# Altium PCB smarmcuPcb.PcbDoc
Units mil, origin at the board's own origin, x right, y up, seen from the top; angles counter-clockwise.
Board outline 2370 x 1812 mil, 4 copper layers (Top Layer, GND_layer, 3.3V_layer, Bottom Layer), stack 23.756 mil thick; 88 components, 43 nets, 255 pads, 84 vias.
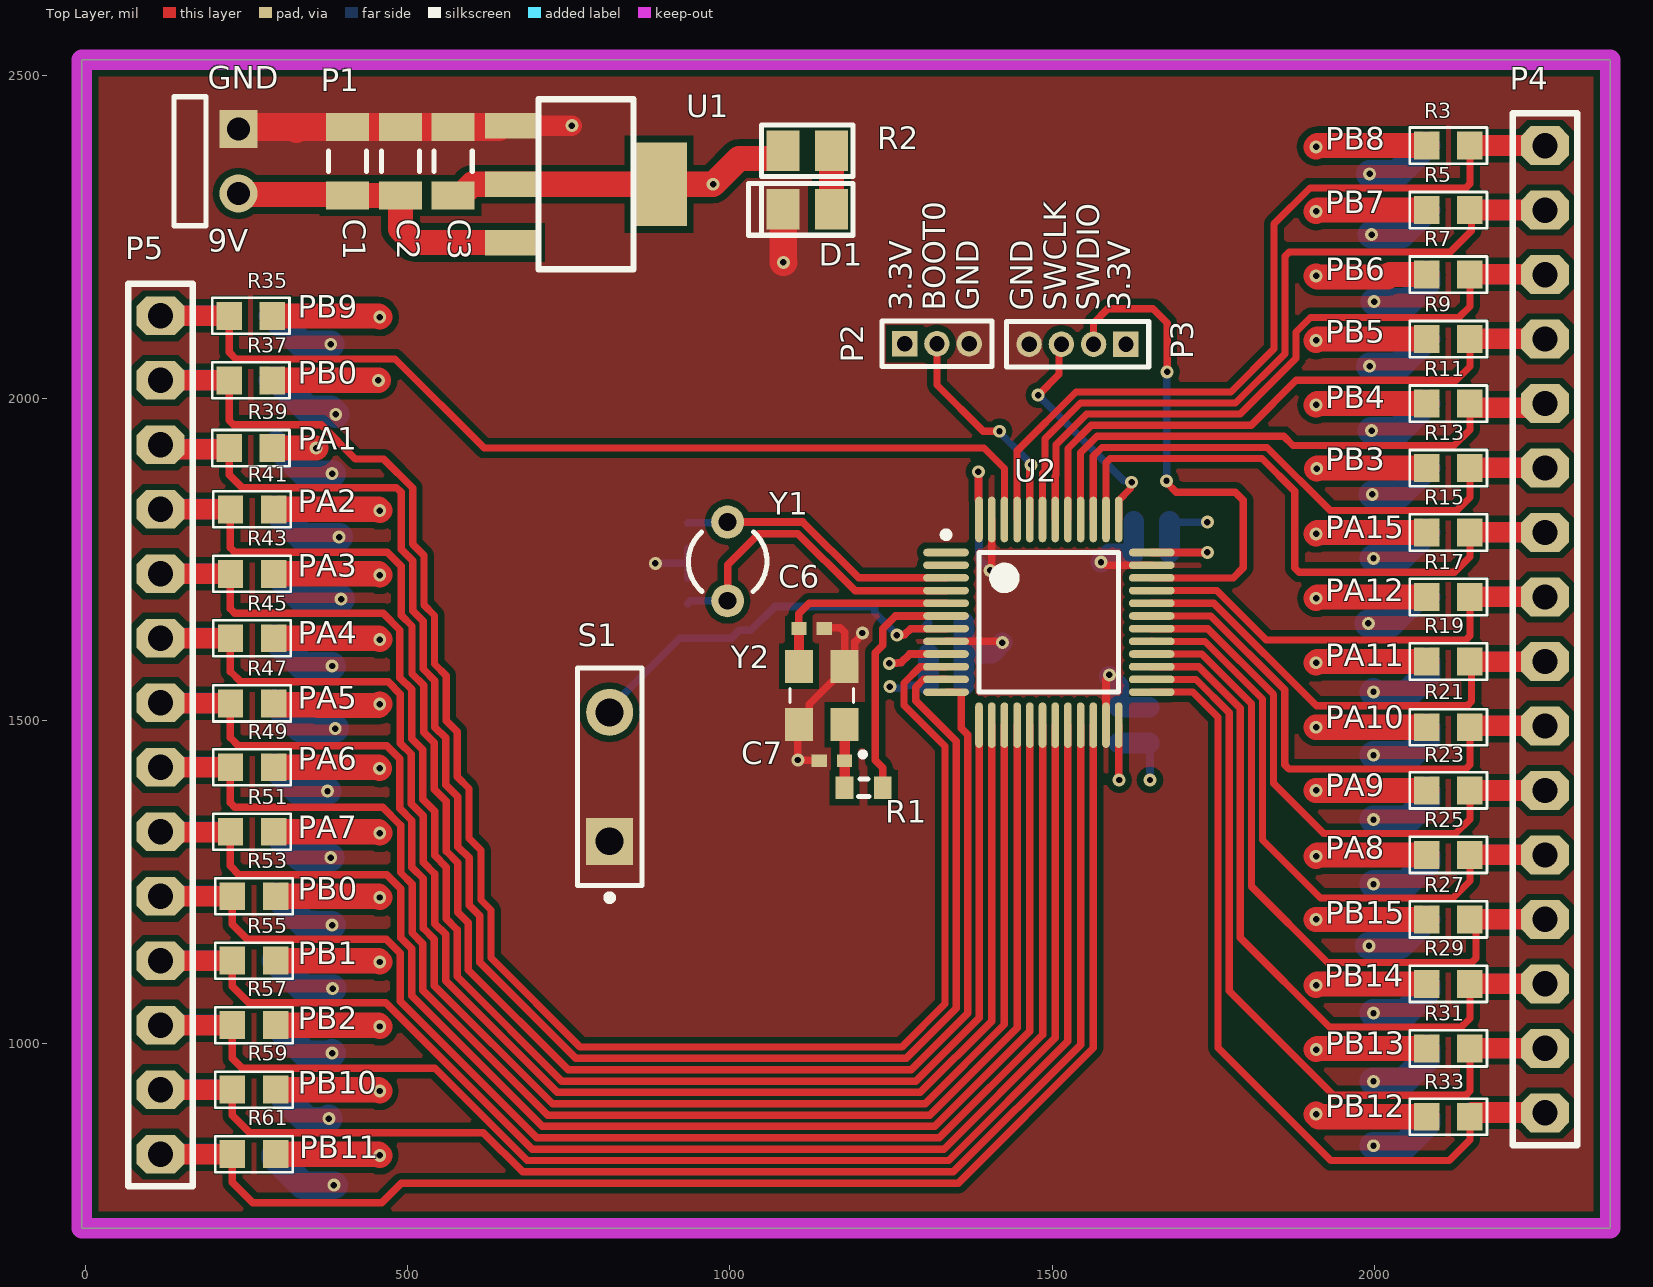
[diagram p0: Top Layer view]
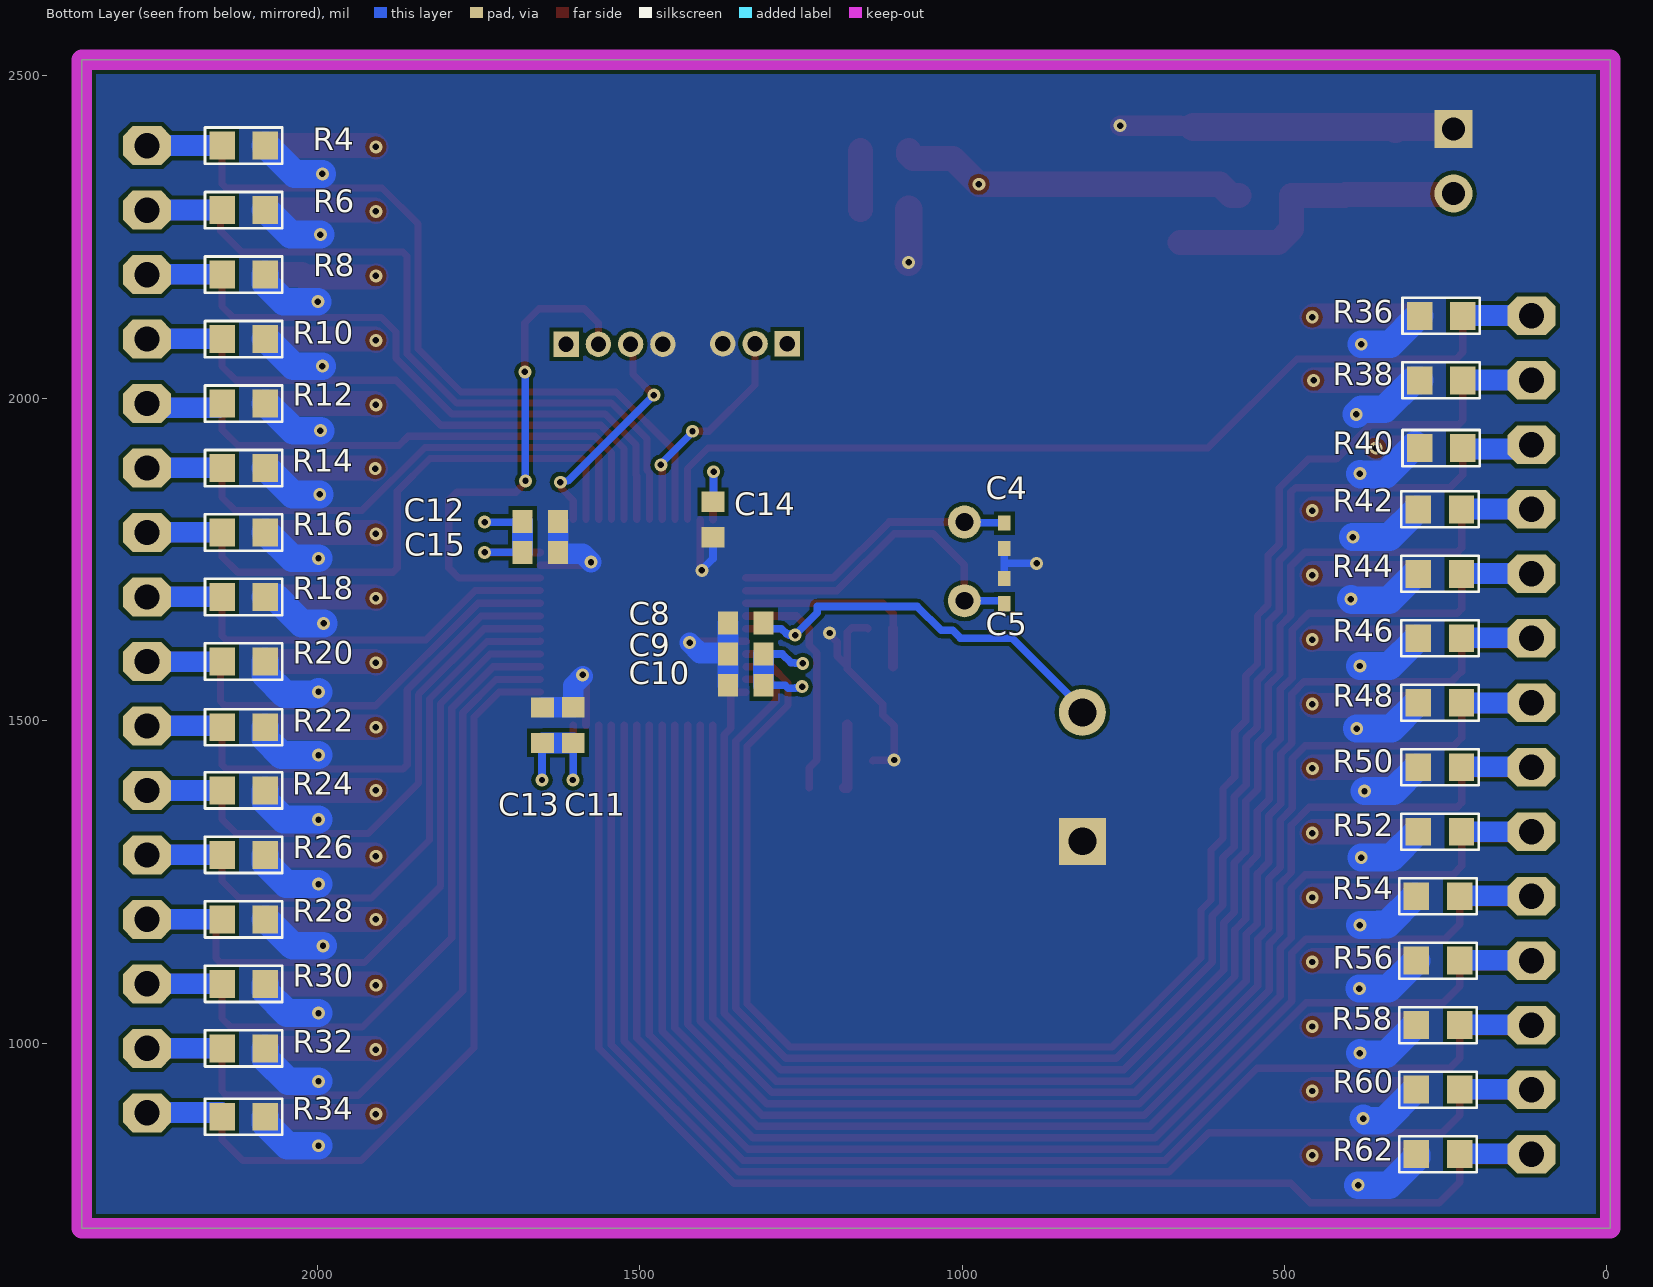
[diagram p1: Bottom Layer view, seen from below]
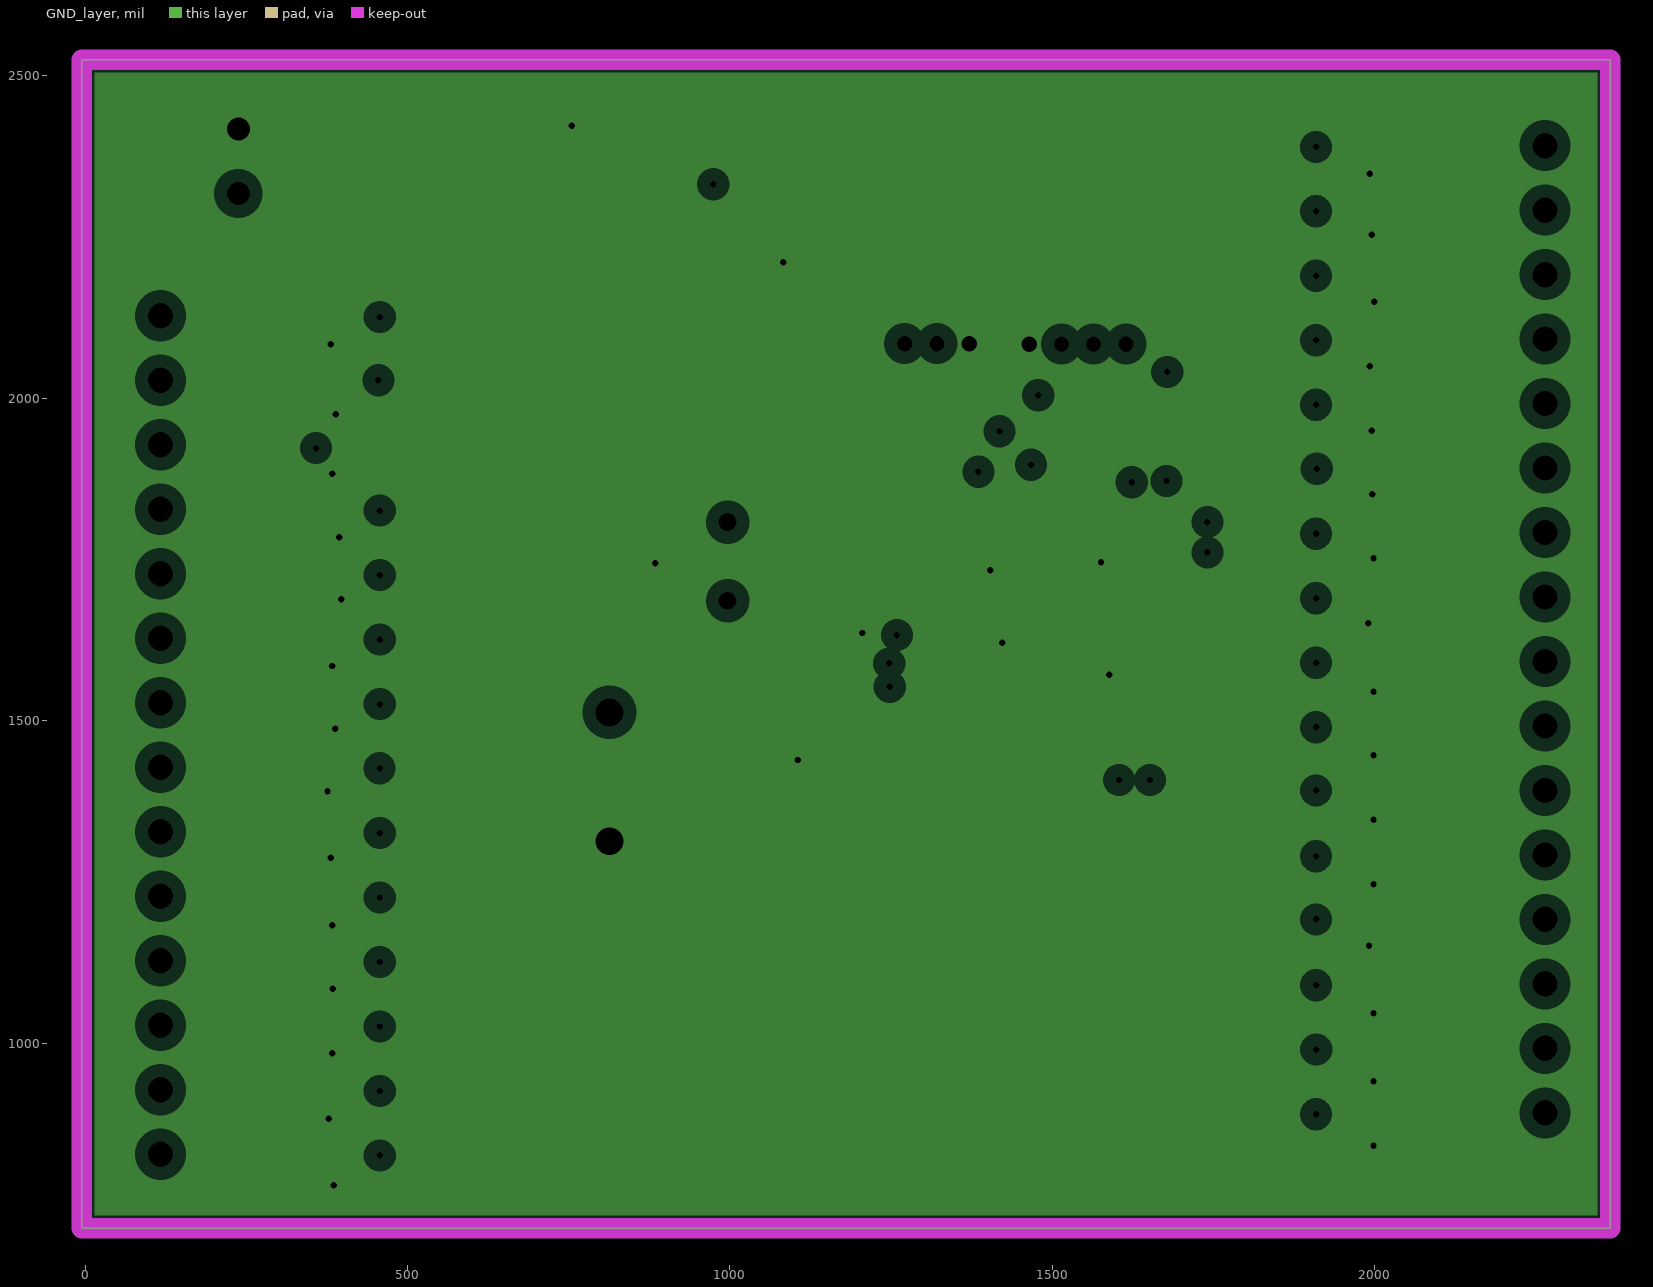
[diagram p2: GND_layer, clearances drawn from the general rule]
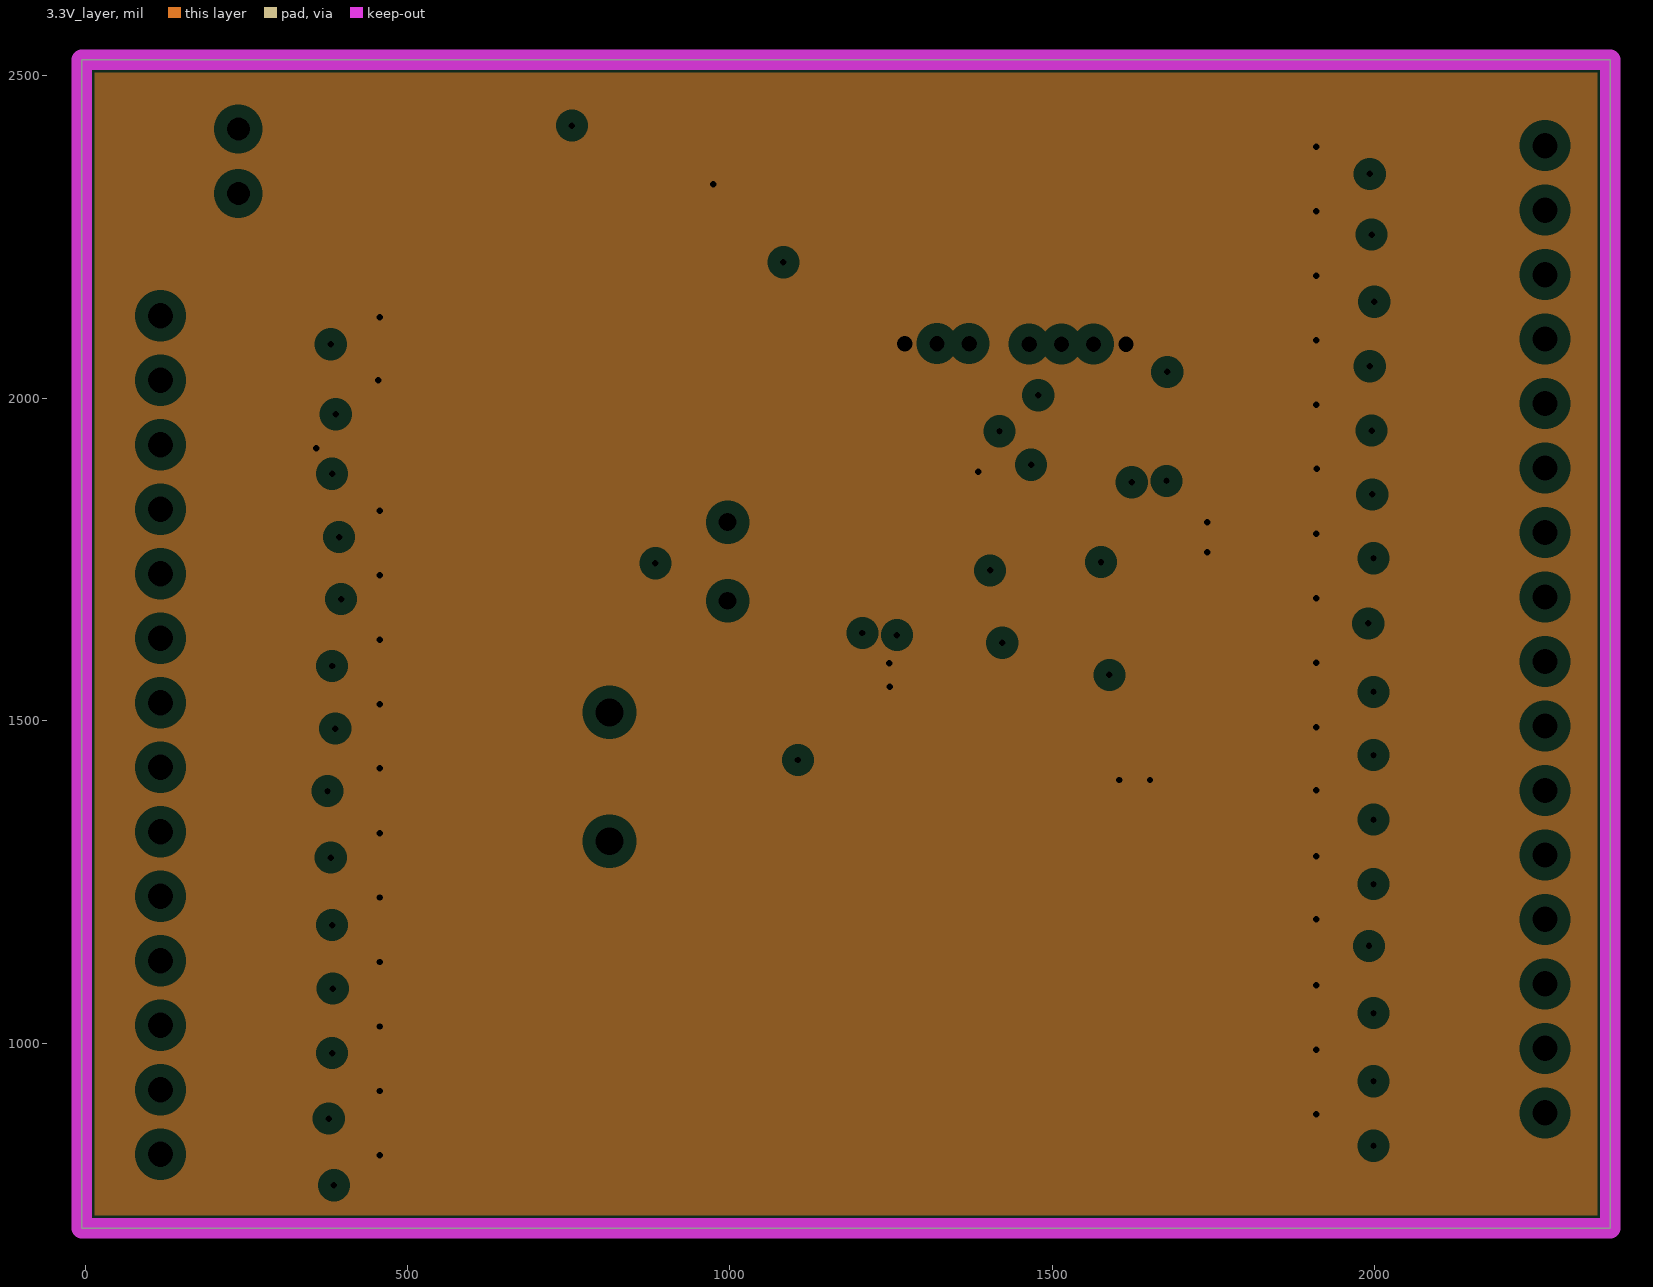
[diagram p3: 3.3V_layer, clearances drawn from the general rule]
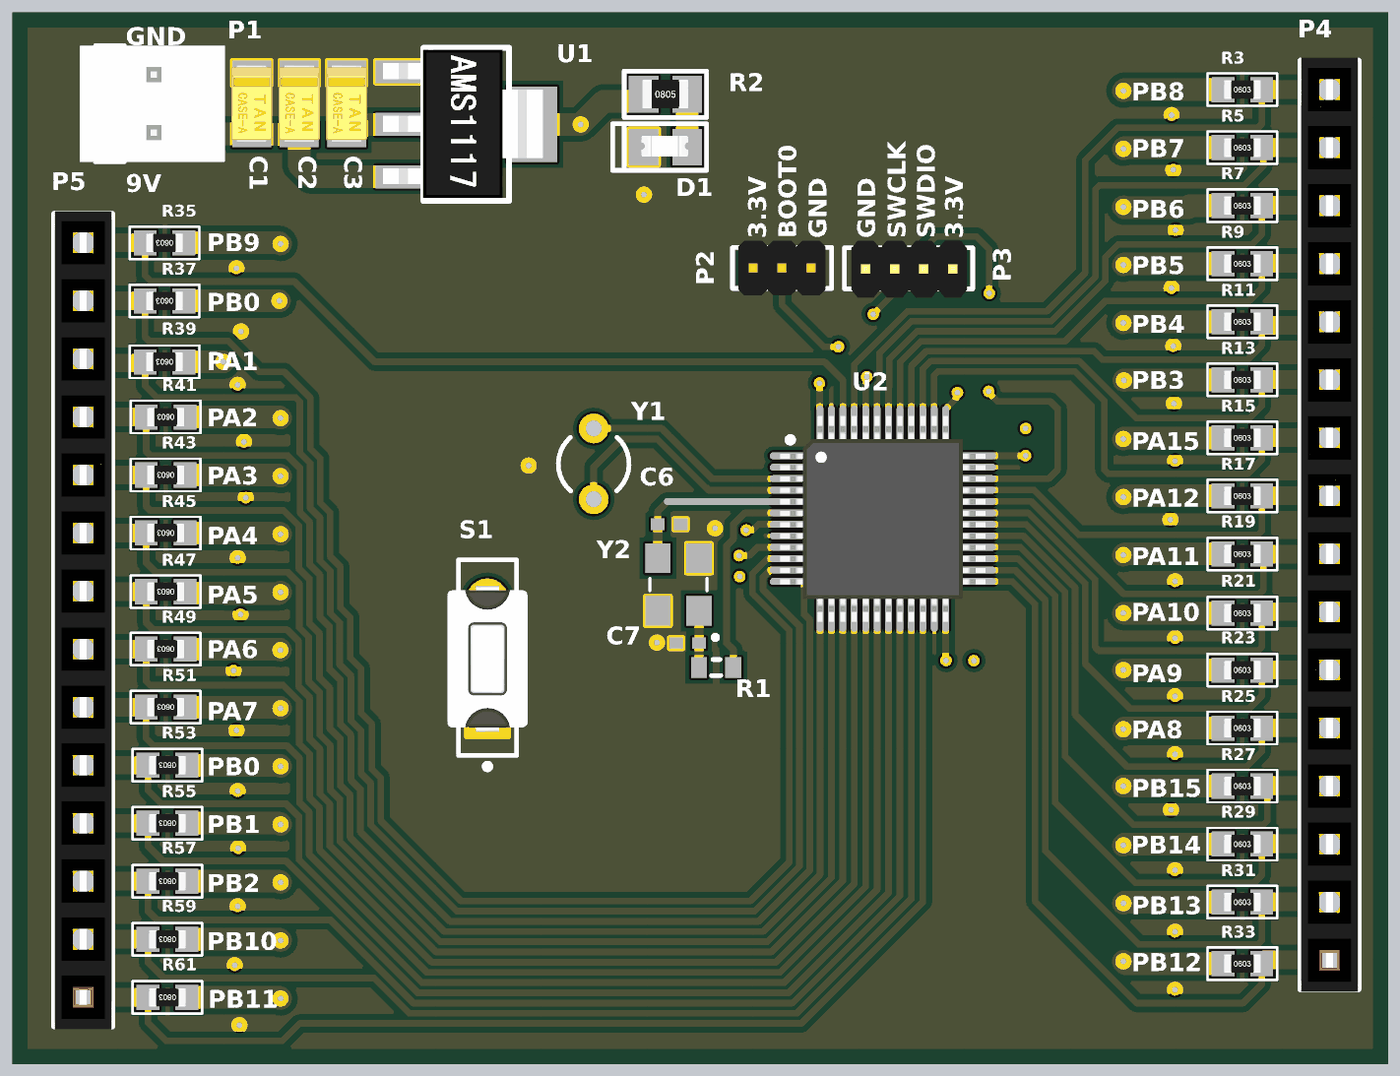
[diagram p4: 3D render of the assembled board from above, using the file's embedded part models]
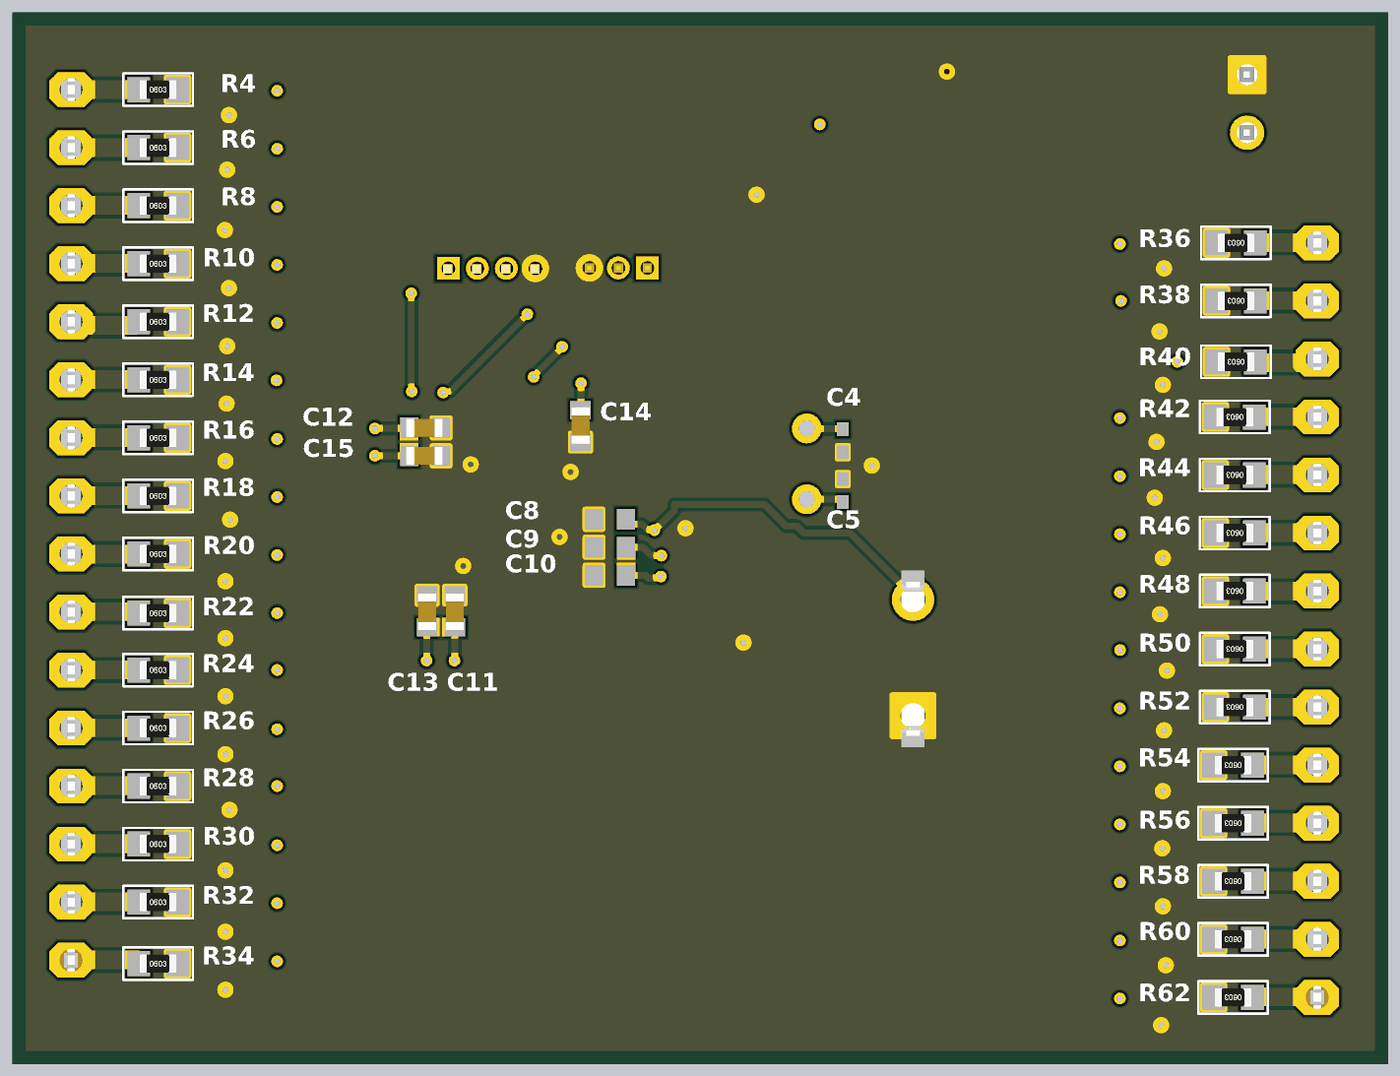
[diagram p5: 3D render of the assembled board from below, using the file's embedded part models]

## Layer stack, top to bottom
Top Solder: solder mask 0.4, Solder Resist, Dk 3.5
Top Layer: signal copper 1.4
Dielectric 2: prepreg 2.8, PP-006, Dk 4.1
GND_layer: plane copper 1.378, net GND
Dielectric 1: dielectric 12.6, FR-4, Dk 4.8
3.3V_layer: plane copper 1.378, net +3.3V
Dielectric 3: prepreg 2.8, PP-006, Dk 4.1
Bottom Layer: signal copper 1.4
Bottom Solder: solder mask 0.4, Solder Resist, Dk 3.5

## Board outline
-5,713 -5,2525 2365,2525 2365,713

## Design rules (kind name [scope] priority, off if disabled: settings)
Clearance "toplayer polygon" [InNamedPolygon('GND_L01_P000')] p1: gap=10 ignorepadtopadclearanceinfootprint=FALSE
Clearance [All] p2: gap=6 ignorepadtopadclearanceinfootprint=FALSE
ComponentClearance IGNORE [InComponent('Y2') vs InComponent('C7')] p1: gap=10 collisioncheckmode=3 verticalgap=10 showdistances=FALSE donotcheckwithout3dbody=TRUE
ComponentClearance ComponentClearance_1 [All] p2: gap=10 collisioncheckmode=3 verticalgap=10 showdistances=FALSE
MinimumSolderMaskSliver [All] p1: minsoldermaskwidth=2
PlaneClearance [All] p1: clearance=20
PlaneConnect [All] p1: planeconnectstyle=Direct reliefexpansion=20 reliefentries=4 reliefconductorwidth=10 reliefairgap=10
PolygonConnect [All] p1: connectstyle=Direct reliefconductorwidth=10 reliefentries=4 polygonreliefangle="90 Angle" airgapwidth=10
RoutingVias [All] p1: holewidth=10 width=20 viastyle="Through Hole" minholewidth=10 minwidth=20 maxholewidth=28 maxwidth=50
SilkToSilkClearance [All] p1: silktosilkclearance=4
SilkToSolderMaskClearance [IsPad] p1: minsilkscreentomaskgap=2 clearancetoexposedcopper=TRUE
SolderMaskExpansion [All] p1: expansion=4 istentingtop=FALSE
Width [All] p1: maxlimit=43 minlimit=10 preferedwidth=10
24 further rules are at their usual default settings.

## Classes and differential pairs
component class mcu: C4 C5 C6 C7 C8 C9 C10 C11 C12 C13 C14 C15 P2 P3 P4 P5 R1 R4 R6 R8 R10 R12 R14 R16 R18 R20 R22 R24 R26 R28 R30 R32 R34 R35 R36 R37 R38 R39 R40 R41 R42 R43 R44 R45 R46 R47 R48 R49 R50 R51 R52 R53 R54 R55 R56 R57 R58 R59 R60 R61 R62 S1 U2 Y1 Y2
component class PowerSupply: C1 C2 C3 D1 P1 R2 U1

## Components (designator, comment, footprint, x,y, rotation, side; value= is the part's Value field where it differs from the comment)
C1 "tantalum cap" C1206tancap 570.84,2367.69 r270 top value=100uF
C2 "tantalum cap" C1206tancap 489.04,2367.69 r270 top value=10uF
C3 "tantalum cap" C1206tancap 407.23,2367.69 r270 top value=100uF
C4 "Cap Semi" 0402 934.43,1786.89 r90 bottom value=10pF
C5 "Cap Semi" 0402 934.43,1701.21 r270 bottom value=10pF
C6 "Cap Semi" 0402 1126.68,1643.21 r180 top value=10pF
C7 "Cap Semi" 0402 1158.17,1438.21 r0 top value=10pF
C8 "" 1608[0603] 1335.49,1651.69 r180 bottom value=100nF
C9 "Cap Semi" 1608[0603] 1335.43,1603.54 r180 bottom value=10nF
C10 "Cap Semi" 1608[0603] 1335.43,1555.21 r180 bottom value=1uF
C11 "Cap Semi_1" 1608[0603]cap 1602.85,1493.31 r270 bottom value=100nF
C12 "Cap Semi_1" 1608[0603]cap 1654.03,1809.21 r0 bottom value=100nF
C13 "Cap Semi_1" 1608[0603]cap 1650.43,1493.21 r270 bottom value=100nF
C14 "Cap Semi_1" 1608[0603]cap 1386.32,1812.21 r90 bottom value=100nF
C15 "Cap Semi" 1608[0603]cap 1654.03,1761.03 r0 bottom value=4,7uF
D1 "LED" MY_LED_0805 1120,2296 r0 top
P1 "" HDR1X2H3dbody 237.84,2417.69 r270 top
P2 "" MHDR1X3body 1271,2084.76 r0 top
P3 "" MHDR1X4body 1614,2084 r180 top
P4 "Header 16" MY_FE16 2264,1642 r90 top
P5 "Header 14" MY_FE14 117,1478 r90 top
R1 "Res3" J1-0603 1207.39,1396.21 r0 top value=10R
R2 "330R" MY_0805 1120,2384 r0 top
R3 "1K" MY_0603 2114,2392 r0 top
R4 "1K" MY_0603 2114,2392 r180 bottom
R5 "1K" MY_0603 2114,2292 r0 top
R6 "1K" MY_0603 2114,2292 r180 bottom
R7 "1K" MY_0603 2114,2192 r0 top
R8 "1K" MY_0603 2114,2192 r180 bottom
R9 "1K" MY_0603 2114,2092 r0 top
R10 "1K" MY_0603 2114,2092 r180 bottom
R11 "1K" MY_0603 2114,1992 r0 top
R12 "1K" MY_0603 2114,1992 r180 bottom
R13 "1K" MY_0603 2114,1892 r0 top
R14 "1K" MY_0603 2114,1892 r180 bottom
R15 "1K" MY_0603 2114,1792 r0 top
R16 "1K" MY_0603 2114,1792 r180 bottom
R17 "1K" MY_0603 2114,1692 r0 top
R18 "1K" MY_0603 2114,1692 r180 bottom
R19 "1K" MY_0603 2114,1592 r0 top
R20 "1K" MY_0603 2114,1592 r180 bottom
R21 "1K" MY_0603 2114,1490 r0 top
R22 "1K" MY_0603 2114,1490 r180 bottom
R23 "1K" MY_0603 2114,1392 r0 top
R24 "1K" MY_0603 2114,1392 r180 bottom
R25 "1K" MY_0603 2114,1292 r0 top
R26 "1K" MY_0603 2114,1292 r180 bottom
R27 "1K" MY_0603 2114,1192 r0 top
R28 "1K" MY_0603 2114,1192 r180 bottom
R29 "1K" MY_0603 2114,1092 r0 top
R30 "1K" MY_0603 2114,1092 r180 bottom
R31 "1K" MY_0603 2114,992 r0 top
R32 "1K" MY_0603 2114,992 r180 bottom
R33 "1K" MY_0603 2114,886 r0 top
R34 "1K" MY_0603 2114,886 r180 bottom
R35 "1K" MY_0603 257,2128 r180 top
R36 "1K" MY_0603 257,2128 r0 bottom
R37 "1K" MY_0603 257,2028 r180 top
R38 "1K" MY_0603 257,2028 r0 bottom
R39 "1K" MY_0603 257,1923 r180 top
R40 "1K" MY_0603 257,1923 r0 bottom
R41 "1K" MY_0603 259,1828 r180 top
R42 "1K" MY_0603 259,1828 r0 bottom
R43 "1K" MY_0603 259,1728 r180 top
R44 "1K" MY_0603 259,1728 r0 bottom
R45 "1K" MY_0603 259,1628 r180 top
R46 "1K" MY_0603 259,1628 r0 bottom
R47 "1K" MY_0603 259,1527 r180 top
R48 "1K" MY_0603 259,1528 r0 bottom
R49 "1K" MY_0603 259,1428 r180 top
R50 "1K" MY_0603 259,1428 r0 bottom
R51 "1K" MY_0603 259,1328 r180 top
R52 "1K" MY_0603 259,1328 r0 bottom
R53 "1K" MY_0603 262,1228 r180 top
R54 "1K" MY_0603 262,1228 r0 bottom
R55 "1K" MY_0603 262,1128 r180 top
R56 "1K" MY_0603 262,1128 r0 bottom
R57 "1K" MY_0603 262,1028 r180 top
R58 "1K" MY_0603 262,1028 r0 bottom
R59 "1K" MY_0603 262,928 r180 top
R60 "1K" MY_0603 262,928 r0 bottom
R61 "1K" MY_0603 262,828 r180 top
R62 "1K" MY_0603 262,828 r0 bottom
S1 "" SPST-2_body 813.43,1413.21 r90 top
U1 "" "4 PIN-SOT" 776.02,2200.24 r270 top
U2 "" STM-LQFP48_N 1494.57,1652.76 r0 top
Y1 "XTAL" R38 996.43,1747.21 r0 top
Y2 "ECS-80-12-33-JGN-TR" XTAL_ECS-240-8-33-AGN-TR 1142.43,1539.21 r90 top

## Footprints (in the part's own frame and the unit in brackets; to place one, negate y for a bottom-side part, rotate by r counter-clockwise, add the part's x,y. Pads: shape width x height; smd on the part's side, far side on the other; paste and mask are expansions set on the pad)
"4 PIN-SOT" [mm]
  rect 1x2.1 smd: 0(-1.05,-2.9) 1(-5.65,-2.9) 2(-3.35,-2.9)
  rect 3.3x2.2 smd: 2(-3.35,2.9)
  silkscreen extent -6.7,-1.85 0,1.89, body extent -6.63,-3.63 -0.13,3.37, height 1.61
0402 [mm] "Chip Capacitor, Body 1.0x0.5mm, IPC High Density"
  rect 0.6x0.5 smd: 1(-0.5,0) 2(0.5,0)
  body extent -0.55,-0.3 0.55,0.3, height 1.3
1608[0603] [mm] "Chip Capacitor, Body 1.6x0.8mm, IPC High Density"
  rect 0.8x0.9 smd: 1(-0.7,0) 2(0.7,0)
  body extent -0.87,-0.48 0.87,0.48, height 1.3
1608[0603]cap [mm]
  rect 0.8x0.9 smd: 1(-0.7,0) 2(0.7,0)
  body extent -0.77,-0.4 0.83,0.4, height 0.9
C1206tancap [mm]
  rect 1.1x1.7 smd: 1(-1.35,0) 2(1.35,0)
  silkscreen extent -0.4,-0.75 0.4,0.75, body extent -1.7,-0.9 1.7,0.9, height 1.8
HDR1X2H3dbody [mm]
  rect 1.5x1.5 hole 0.9: 1(0,0)
  round 1.5 hole 0.9: 2(2.54,0)
  silkscreen extent -1.27,-2.54 3.81,-1.27, body extent -1.27,-3.23 3.81,3.12, height 11.19
J1-0603 [mm] "Chip Resistor, Body 1.6x0.8mm, IPC High Density"
  rect 0.7x0.9 smd: 1(-0.75,0) 2(0.75,0)
  silkscreen extent -0.2,-0.35 0.2,0.35, body extent -0.85,-0.48 0.85,0.48, height 0.9
MHDR1X3body [mm]
  rect 1x1 hole 0.6: 1(0,0)
  round 1 hole 0.6: 2(1.27,0) 3(2.54,0)
  silkscreen extent -0.9,-0.9 3.44,0.9, body extent -0.64,-1.2 3.17,1.2, height 5
MHDR1X4body [mm]
  rect 1x1 hole 0.6: 1(0,0)
  round 1 hole 0.6: 2(1.27,0) 3(2.54,0) 4(3.81,0)
  silkscreen extent -0.9,-0.9 4.71,0.9, body extent -0.66,-1.22 4.42,1.28, height 4.61
MY_0603 [mm]
  rect 1x1.1 smd: 1(-0.85,0) 2(0.85,0)
  silkscreen extent -1.52,-0.71 1.52,0.71, body extent -0.8,-0.4 0.8,0.4, height 0.44
MY_0805 [mm]
  rect 1.3x1.6 smd: 1(-0.95,0) 2(0.95,0)
  silkscreen extent -1.8,-1.02 1.8,1.02, body extent -1,-0.62 1,0.63, height 0.59
MY_FE14 [mil]
  oct 60x75 hole 39.37: 1(-650,0) 2(-550,0) 3(-450,0) 4(-350,0) 5(-250,0) 6(-150,0) 7(-50,0) 8(50,0) 9(150,0) 10(250,0) 11(350,0) 12(450,0) 13(550,0) 14(650,0)
  silkscreen extent -700,-50 700,50, body extent -705,-49 705,49, height 335
MY_FE16 [mil]
  oct 60x75 hole 39.37: 1(-750,0) 2(-650,0) 3(-550,0) 4(-450,0) 5(-350,0) 6(-250,0) 7(-150,0) 8(-50,0) 9(50,0) 10(150,0) 11(250,0) 12(350,0) 13(450,0) 14(550,0) 15(650,0) 16(750,0)
  silkscreen extent -800,-50 800,50, body extent -805,-49 805,49, height 335
MY_LED_0805 [mm]
  rect 1.3x1.6 smd: A(0.95,-0.076) K(-0.95,-0.076)
  silkscreen extent -2.31,-1.09 1.8,0.94, body extent -1.06,-0.48 1.01,0.42, height 0.86
R38 [mm] "Crystal, Thru-Hole; 2 Leads; Body 3.1 x 8.2 mm (Dia.xH)"
  round 1.3 hole 0.7: 1(0,1.55) 2(0,-1.55)
  silkscreen extent -1.55,-1.19 1.55,1.17
SPST-2_body [mm]
  rect 1.85x1.85 hole 1.1: 1(-2.54,0)
  round 1.85 hole 1.1: 2(2.54,0)
  silkscreen extent -4.89,-1.27 4.28,1.27, body extent -3.93,-1.75 3.83,1.75, height 5.25
STM-LQFP48_N [mm]
  oval 1.8x0.3 smd: 1(-4.05,2.75) 2(-4.05,2.25) 3(-4.05,1.75) 4(-4.05,1.25) 5(-4.05,0.75) 6(-4.05,0.25) 7(-4.05,-0.25) 8(-4.05,-0.75) 9(-4.05,-1.25) 10(-4.05,-1.75) 11(-4.05,-2.25) 12(-4.05,-2.75) 25(4.05,-2.75) 26(4.05,-2.25) 27(4.05,-1.75) 28(4.05,-1.25) 29(4.05,-0.75) 30(4.05,-0.25) 31(4.05,0.25) 32(4.05,0.75) 33(4.05,1.25) 34(4.05,1.75) 35(4.05,2.25) 36(4.05,2.75)
  oval 0.3x1.8 smd: 13(-2.75,-4.05) 14(-2.25,-4.05) 15(-1.75,-4.05) 16(-1.25,-4.05) 17(-0.75,-4.05) 18(-0.25,-4.05) 19(0.25,-4.05) 20(0.75,-4.05) 21(1.25,-4.05) 22(1.75,-4.05) 23(2.25,-4.05) 24(2.75,-4.05) 37(2.75,4.05) 38(2.25,4.05) 39(1.75,4.05) 40(1.25,4.05) 41(0.75,4.05) 42(0.25,4.05) 43(-0.25,4.05) 44(-0.75,4.05) 45(-1.25,4.05) 46(-1.75,4.05) 47(-2.25,4.05) 48(-2.75,4.05)
  silkscreen extent -4.17,-2.75 2.75,3.57, body extent -4.5,-4.51 4.5,4.49, height 1.56
XTAL_ECS-240-8-33-AGN-TR [mm]
  rect 1.3x1.1 smd: 1(-1.15,-0.9) 2(1.15,-0.9) 3(1.15,0.9) 4(-1.15,0.9)
  silkscreen extent -2.42,-1.71 0.27,1.25

## Part data
C1 C3: library part "Cap Semi_6", "Capacitor (Semiconductor SIM Model)", LatestRevisionDate=29-May-2009, LatestRevisionNote="IPC-7351 Footprint Added.", PackageDescription="Chip Capacitor", PackageReference=C1206, Published=8-Jun-2000, Publisher="Altium Limited"
C2: library part "Cap Semi_5", "Capacitor (Semiconductor SIM Model)", LatestRevisionDate=29-May-2009, LatestRevisionNote="IPC-7351 Footprint Added.", PackageDescription="Chip Capacitor", PackageReference=C1206, Published=8-Jun-2000, Publisher="Altium Limited"
C4 C5 C6 C7 C9 C10 C11 C12 C15: "Capacitor (Semiconductor SIM Model)", LatestRevisionDate=29-May-2009, LatestRevisionNote="IPC-7351 Footprint Added.", PackageDescription="Chip Capacitor", PackageReference=C1206, Published=8-Jun-2000, Publisher="Altium Limited"
C8: library part "Cap Semi", "Capacitor (Semiconductor SIM Model)", LatestRevisionDate=29-May-2009, LatestRevisionNote="IPC-7351 Footprint Added.", PackageDescription="Chip Capacitor", PackageReference=C1206, Published=8-Jun-2000, Publisher="Altium Limited"
C13: library part "Cap Semi_1_2", "Capacitor (Semiconductor SIM Model)", LatestRevisionDate=29-May-2009, LatestRevisionNote="IPC-7351 Footprint Added.", PackageDescription="Chip Capacitor", PackageReference=C1206, Published=8-Jun-2000, Publisher="Altium Limited"
C14: library part "Cap Semi_1_3", "Capacitor (Semiconductor SIM Model)", LatestRevisionDate=29-May-2009, LatestRevisionNote="IPC-7351 Footprint Added.", PackageDescription="Chip Capacitor", PackageReference=C1206, Published=8-Jun-2000, Publisher="Altium Limited"
D1: "Typical INFRARED GaAs LED", ASiD Part Number=LED-AS
P1: library part "Header 2H", "Battery connection", voltage=5V, LatestRevisionDate=17-Jul-2002, LatestRevisionNote="Re-released for DXP Platform.", Publisher="Altium Limited"
P2: library part MHDR1X3, "Header, 3-Pin", LatestRevisionDate=17-Jul-2002, LatestRevisionNote="Re-released for DXP Platform.", Publisher="Altium Limited"
P3: library part MHDR1X4, "Header, 4-Pin", LatestRevisionDate=17-Jul-2002, LatestRevisionNote="Re-released for DXP Platform.", Publisher="Altium Limited"
P4: "Header, 16-Pin", ASiD Part Number="Header 16-AS"
P5: "Header, 14-Pin", ASiD Part Number="Header 14-AS"
R1: "Resistor", LatestRevisionDate=29-May-2009, LatestRevisionNote="IPC-7351 Footprint Added.", PackageDescription="Chip Resistor", PackageReference=J1-0603, Published=8-Jun-2000, Publisher="Altium Limited"
R2 R3 R4 R5 R6 R7 R8 R9 R10 R11 R12 R13 R14 R15 R16 R17 R18 R19 R20 R21 R22 R23 R24 R25 R26 R27 R28 R29 R30 R31 R32 R33 R34 R35 R36 R37 R38 R39 R40 R41 R42 R43 R44 R45 R46 R47 R48 R49 R50 R51 R52 R53 R54 R55 R56 R57 R58 R59 R60 R61 R62: library part Res, "Standard resistor", ASiD Part Number=Res-AS
S1: library part SW-PB, "Switch", LatestRevisionDate=17-Jul-2002, LatestRevisionNote="Re-released for DXP Platform.", PackageDescription="Switch; 2 Leads", PackageReference=SPST-2, Published=24-Mar-1999, Publisher="Altium Limited"
U1: library part lm1117, "The LM1117 is a low dropout voltage regulator with a dropout of / 1.2 V at 800 mA of load current. The LM1117 is available in an / adjustable version, which can set the output voltage from 1.25 to / 13.8 V with only two external resistors. In addition, it is available in / five fixed voltages, 1.8 V, 2.5 V, 3.3 V, and 5 V. / The LM1117 offers current limiting and thermal shutdown. Its / circuit is trimmed to assure output voltage accuracy to within +/−1%", voltage=3.3V
U2: library part STM32F103C8T6, "ARM Cortex-M3 32-bit MCU, 64 KB Flash, 20 KB Internal RAM, 37 I/Os, 48-pin LQFP, -40 to 85 degC, Tray", I/Os (High Current)=37, Operating Frequency(F) (Processor speed) (MHz)=72, Supplier Part Number 1=497-6063-ND, Supply Voltage(Vcc) min (V)=2, A/D Converter="2x12-bit (10 Channel)", ComponentLink1Description="Manufacturer URL", ComponentLink1URL=http://www.st.com/web/en/home.html, ComponentLink2Description=Datasheet, ComponentLink2URL=http://www.st.com/st-web-ui/static/active/en/resource/technical/document/datasheet/CD00161566.pdf, ComponentLink3Description="Package Specification", ComponentLink3URL=http://www.st.com/st-web-ui/static/active/en/resource/technical/document/datasheet/DM00058181.pdf, Core="ARM Cortex-M3", DatasheetVersion="Rev. 16", FLASH Size (Prog) (kB)=64, Internal RAM Size (kB)=20, Mounting Technology="Surface Mount", PackageDescription="48-Pin Low Profile Quad Flat Package, 7 x 7 mm Body, 0.5 mm Pitch", PackageReference=LQFP48, PackageVersion="Rev. 6, 06/2013", Packing=Tray, PartNumber=STM32F103C8T6, Supplier 1=Digi-Key, Supplier 2=Farnell, Supplier 3=Newark, Supplier 4=Newark, Supplier 5=Mouser, Supplier Part Number 2=1447637, Supplier Part Number 3=59M2182, Supplier Part Number 4=57P1222, Supplier Part Number 5=511-STM32F103C8T6
Y1: "Crystal Oscillator", LatestRevisionDate=17-Jul-2002, LatestRevisionNote="Re-released for DXP Platform.", PackageDescription="Crystal, Thru-Hole; 2 Leads; Body 3.1 x 8.2 mm (Dia.xH)", PackageReference=R38, Published=8-Jun-2000, Publisher="Altium Limited"
Y2: "8MHz Â±20ppm Crystal 12pF 400 Ohms 4-SMD, No Lead", Package="SMD-4 ECS International", Availability=Warning, BuyPart=https://www.snapeda.com/parts/ECS-80-12-33-JGN-TR/ECS%20Inc./view-part/4477300/?ref=eda, MF="ECS Inc.", Mouser-Purchase-URL=https://snapeda.com/shop?store=Mouser&id=4477300, MP=ECS-80-12-33-JGN-TR, Price=None, SnapEDA_Link=https://www.snapeda.com/parts/ECS-80-12-33-JGN-TR/ECS%20Inc./view-part/4477300/?ref=snap

## Via types
v1: diameter 20, hole 10, Top Layer to Bottom Layer, 84 vias

## Nets (pads, with @x,y where several pads share a name; then routed paths per layer and width w, separated by ;. In a path a pad name is that pad's centre, name@x,y a point inside that pad or via, vN(x,y) a via of type N, cw(c..) or ccw(c..) an arc to the next point about the centre after c; other vN are vias at no path point)
"32KHz 01": C4.2 U2.3 Y1.1 | length 437.3
  Top Layer w11.8: Y1.1 1113.06,1808.23 1199.63,1721.66 U2.3
  Bottom Layer w11.8: C4.2 935.25,1807.4 995.6,1807.4 Y1.1
"32KHz 02": C5.2 U2.4 Y1.2 | length 515.5
  Top Layer w11.8: Y1.2 996.43,1742.21 1044.43,1790.21 1105.43,1790.21 1189.43,1706.21 1189.91,1706.21 1194.14,1701.97 U2.4
  Bottom Layer w11.8: C5.2 934.43,1682.24 938.37,1686.18 Y1.2
+3.3V: C1.2 C9.2 C10.2 C11.2 C12.2 C13.2 C14.2 C15.2 P2.1 P3.1 R2.1 R3.1 R5.1 R7.1 R9.1 R11.1 R13.1 R15.1 R17.1 R19.1 R21.1 R23.1 R25.1 R27.1 R29.1 R31.1 R33.1 R35.1 R37.1 R39.1 R41.1 R43.1 R45.1 R47.1 R49.1 R51.1 R53.1 R55.1 R57.1 R59.1 R61.1 U1.2 U2.9 U2.24 U2.36 U2.48 | length 6404.1
  Top Layer w11.8: v1(1247,1589) 1259,1589 1260,1590 1265.22,1590 1278.76,1603.54 U2.9 ; v1(1385.43,1886.21) 1385.43,1842.63 1386.32,1841.74 U2.48 ; U2.24@1602.85,1493.31 1602.85,1408.78 v1(1603.43,1408.21) ; U2.36 1740.25,1761.03 v1(1740.43,1761.21)
  Top Layer w39: C1.2 582.65,2314.54 600.07,2331.96 661.66,2331.96 661.84,2332.14 973.86,2332.14 v1(974,2332)
  Top Layer w39.02: R39.1@290.64,1923 v1(358.25,1923) ; R37.1@290.64,2028 v1(455,2028) ; R35.1@290.64,2128 455,2128 v1(457,2126) ; R51.1@292.64,1328 455,1328 v1(457,1326) ; R49.1@292.64,1428 455,1428 v1(456.69,1426.31) ; R47.1@292.64,1526 292.64,1524.85 360.04,1524.85 361,1523.89 454.89,1523.89 v1(457,1526) ; R45.1@292.64,1628 455,1628 v1(457,1626) ; R43.1@292.64,1728 455,1728 v1(457,1726) ; R41.1@292.64,1828 455,1828 v1(457,1826) ; R61.1 455,828 v1(457,826) ; R59.1 455,928 v1(457,926) ; R57.1 455,1028 v1(457,1026) ; R55.1 455,1128 v1(457,1126) ; R53.1 455,1228 v1(457,1226) ; v1(974,2332) 1014.01,2372.01 1076.52,2372.01 1082.6,2378.09 R2.1 ; v1(1909,890) 1913,886 2080.36,886 2080.36,887.79 R33.1@2080.71,888.15 ; v1(1909,1090) 1911,1092 R29.1 R29.1@2080.71,1092 ; v1(1909,1192) R27.1 R27.1@2080.71,1192 ; v1(1909,1290) 1911,1292 R25.1 R25.1@2080.71,1292 ; v1(1909,1392) R23.1 R23.1@2080.71,1392 ; v1(1909,1490) R21.1 R21.1@2080.71,1490 ; v1(1909,1590) 1911,1592 R19.1@2080.71,1592 ; v1(1909,1690) 1911,1692 R17.1 R17.1@2080.71,1692 ; v1(1909,1790) 1911,1792 R15.1 R15.1@2080.71,1792 ; v1(1909,1990) 1911,1992 R11.1 R11.1@2080.71,1992 ; v1(1909,2090) 1911,2092 R9.1@2080.71,2092 ; v1(1909,2190) 1910.71,2188.29 2019.83,2188.29 2023.54,2192 R7.1 R7.1@2080.71,2192 ; v1(1909,2290) 1911,2292 R5.1 R5.1@2080.71,2292 ; v1(1909,2390) 1911,2392 R3.1 R3.1@2080.71,2392 ; v1(1909.14,990.14) 1911,992 R31.1 R31.1@2080.71,992 ; v1(1910,1891) 1911,1892 R13.1 R13.1@2080.71,1892
  Bottom Layer w11.8: v1(1247,1589) 1259,1589 1260,1590 1265.22,1590 1278.76,1603.54 C9.2 ; v1(1248,1553) 1250,1551 1259,1551 1259.79,1550.21 ; 1259,1550.21 1259.79,1550.21 ; C10.2 1274.64,1555.21 1269.64,1550.21 1259.79,1550.21 ; v1(1385.43,1886.21) 1385.43,1840.66 C14.2 ; v1@1602.85,1408.78 C11.2 ; C13.2 1651.43,1464.65 v1(1651.43,1408.21) v1@1651.43,1406.21 ; C15.2 1681.77,1761.21 v1(1740.43,1761.21) ; C12.2 1682.59,1808.21 v1@1739.43,1808.21
  Bottom Layer w32: C10.2 C9.2 ; C11.2 C11.2 1650.37,1465.7 C13.2 ; C15.2 C12.2
  other v1: 1740.43,1808.21
+9V: C2.2 C3.2 P1.2 U1.0 | length 485.7
  Top Layer w39: P1.2 239.42,2316.12 405.66,2316.12 C3.2 C2.2 489.04,2262.5 509.72,2241.82 U1.0@661.61,2241.82
BOOT0: P2.2 U2.44 | length 348.4
  Top Layer w11.2: P2.2 1321.11,2084.65 1321.11,2020.89 1393,1949 v1(1418,1949) ; U2.44 1465.05,1892.7 1466.96,1894.62 v1(1466.96,1897)
  Bottom Layer w11.2: v1(1418,1949) 1418,1947.48 1466.96,1898.52 v1(1466.96,1897)
GND: C1.1 C2.1 C3.1 C4.1 C5.1 C6.1 C7.1 C8.1 C9.1 C10.1 C11.1 C12.1 C13.1 C14.1 C15.1 D1.K P1.1 P2.3 P3.4 R4.2 R6.2 R8.2 R10.2 R12.2 R14.2 R16.2 R18.2 R20.2 R22.2 R24.2 R26.2 R28.2 R30.2 R32.2 R34.2 R36.2 R38.2 R40.2 R42.2 R44.2 R46.2 R48.2 R50.2 R52.2 R54.2 R56.2 R58.2 R60.2 R62.2 S1.1 U1.1 U2.8 U2.23 U2.35 U2.47 Y2.2 Y2.4 | length 5036.6
  Top Layer w11.8: C7.1 1137.99,1438.71 1105.93,1438.71 v1(1105.43,1439.21) 1105.43,1492.36 Y2.4 1122.75,1509.68 1122.75,1525.43 1177.86,1580.54 Y2.2 ; C6.1 1147.36,1644.21 1170.95,1644.21 1177.86,1637.29 Y2.2 ; v1(1205.43,1636.21) 1205.43,1633.99 1193.61,1622.17 1193.61,1600.24 Y2.2 ; U2.8 1418.18,1623.23 1420.21,1621.21 v1(1422.43,1621.21) ; v1(1403.43,1733.21) 1403.43,1735.43 1406,1738 U2.47@1406,1811.78 ; v1(1575.43,1746.21) 1577.64,1746.21 1582.51,1741.34 U2.35 ; U2.23 1583.17,1563.73 1588.43,1568.99 v1(1588.43,1571.21)
  Top Layer w32: U1.1@661.84,2422.69 754.69,2422.69 v1(755,2423)
  Top Layer w42.99: C1.1@570.69,2420.69 C1.1 571,2421 U1.1@642,2421
  Top Layer w43: P1.1 240.84,2420.69 330.84,2420.69 ; 327.84,2417.69 330.84,2420.69 ; C3.1 C3.1@407.08,2420.69 ; C1.1@570.69,2420.69 C3.1@407.08,2420.69 ; D1.K 1082.6,2211.4 v1(1083,2211) ; 330.84,2420.69 C3.1@407.08,2420.69
  Bottom Layer w11.8: v1(884.43,1744.21) 884.58,1744.05 934.43,1744.05 ; C5.1 934.43,1744.05 ; C4.1 934.43,1744.05 ; C14.1 1386.32,1751.2 1403.43,1734.09 v1(1403.43,1733.21) ; v1@1588.43,1568.99 v1(1588.43,1571.21) ; C11.1 C11.1@1602.9,1520.82 ; C13.1 C13.1
  Bottom Layer w32: C10.1 C9.1@1363.01,1605.04 ; C9.1 C9.1@1362.98,1605.01 ; C8.1 C9.1@1363.01,1605.04 ; v1(1422.43,1621.21) 1406.48,1605.26 1363.24,1605.26 C9.1@1363.01,1605.04 ; v1(1575.43,1746.21) 1588.53,1759.31 1626.22,1759.31 1626.47,1759.56 C12.1 ; v1@1588.43,1568.99 1602.85,1554.56 C11.1 ; C11.1@1602.9,1520.82 C13.1
  Bottom Layer w43: R38.2 290.62,2027.85 300.15,2027.85 344.89,1983.11 380.51,1983.11 388.33,1975.29 v1(388.76,1975.29) ; R36.2 292.13,2128 336.13,2084 v1(381,2084) ; R52.2@294.28,1327.85 334.13,1288 v1(381,1288) ; R50.2@294.28,1427.85 331.13,1391 v1(376,1391) ; R48.2@294.28,1527.85 334.13,1488 v1(388,1488) ; R46.2@294.28,1627.85 337.13,1585 v1(383,1585) ; R44.2@294.28,1727.85 297.28,1727.85 338.13,1687 395.2,1687 v1(397,1688.8) ; R42.2@294.28,1827.85 337.13,1785 v1(394,1785) ; R62.2 295.46,822.54 338,780 v1(386,780) ; R56.2 338.66,1084.8 v1(384,1084.8) ; R60.2@297.28,927.85 345.13,880 374.75,880 v1(378,883.25) ; R58.2@297.28,1027.85 342.13,983 381.2,983 v1(383,984.8) ; R54.2@297.28,1227.85 341.13,1184 354,1184 354.75,1183.25 v1(383,1183.25) ; R40.2@297.28,1927.85 343.13,1882 381.75,1882 v1(383,1883.25) ; v1(1990,1651) 2024,1651 2064.85,1691.85 2080.38,1691.85 R18.2 ; v1(1991,1151) 2037.87,1151 2078.87,1192 R28.2 ; v1(1992,2050) 2036.87,2050 2078.87,2092 R10.2 ; v1(1992,2348) 2034.87,2348 2078.87,2392 R4.2 ; v1(1995,1950) 2036.87,1950 2078.87,1992 R12.2 ; v1(1995,2254) 2040.87,2254 2078.87,2292 R6.2 ; v1(1996,1851) 2037.87,1851 2078.87,1892 R14.2 ; v1(1998,841) 2046,841 2080.54,875.54 R34.2 ; v1(1998,941) 2045,941 2080.54,976.54 R32.2 ; v1(1998,1046.85) 2046.85,1046.85 2080.54,1080.54 R30.2 ; v1(1998,1246.85) 2047.85,1246.85 2080.54,1279.54 R26.2 ; v1(1998,1346.85) 2051.85,1346.85 2080.54,1375.54 R24.2 ; v1(1998,1446.85) 2055.35,1446.85 2080.54,1472.04 R22.2 ; v1(1998,1544.85) 2001.85,1541 2050,1541 2080.54,1571.54 R20.2 ; v1(1998,1752) 2038.87,1752 2078.87,1792 R16.2 ; v1(1999,2150) 2052,2150 2080.54,2178.54 R8.2
IN/OUT: C7.2 R1.1 Y2.1 | length 97.7
  Top Layer w16: R1.1 C7.2 Y2.1
NetD1_A: D1.A R2.2 | length 91
  Top Layer w39.02: D1.A R2.2
NetR1_2: R1.2 U2.6 | length 362.7
  Top Layer w11.8: R1.2 1236.91,1427.09 1225.1,1438.9 1225.1,1605.4 1236.91,1617.22 1236.91,1642.69 1256.82,1662.6 U2.6
NRST: C8.2 S1.2 U2.7 | length 693
  Top Layer w11.8: v1(1259,1633) 1268.22,1633 v1@1268.43,1633.21 ; U2.7 1280.35,1642.91 1270.64,1633.21 ; v1@1268.43,1633.21 1267.43,1633.21 1270.64,1633.21 ; v1@1268.43,1633.21 1270.64,1633.21
  Bottom Layer w11.8: S1.2@807.43,1513.21 922.43,1628.21 1002.43,1628.21 1014.43,1640.21 1032.43,1640.21 1069.43,1677.21 1224.43,1677.21 1224.43,1667.57 v1@1258.79,1633.21 ; v1(1259,1633) 1268.22,1633 1269.99,1634.78 ; C8.2 1299.15,1642.91 1280.35,1642.91 1272.21,1634.78 1269.99,1634.78 ; v1@1268.43,1633.21 1269.99,1634.78 ; v1@1268.43,1633.21 1267.43,1633.21 v1@1268.43,1633.21 ; v1@1268.43,1633.21 1269.99,1634.78 ; v1@1268.43,1633.21 1269.99,1634.78
OUT/IN: C6.2 U2.5 Y2.3 | length 316.4
  Top Layer w11.8: C6.2 1106.99,1665.95 1123.33,1682.28 U2.5
  Top Layer w16: Y2.3 C6.2
PA0: P5.13 R37.2 R38.1 U2.10 | length 2780.7
  Top Layer w11.2: R37.2 223.54,1965.56 230.1,1959 366.24,1959 419.44,1905.8 463.2,1905.8 508,1861 508,1774 525.4,1756.6 525.4,1680 542,1663.4 542,1588 560,1570 560,1500 577,1483 577,1413.4 595.4,1395 595.4,1318 614,1299.4 614,1222 629.4,1206.6 629.4,1132.6 768,994 1266.39,994 1333.6,1061.21 1333.6,1460.4 1320.75,1473.25 1270,1524 1270,1558.54 1295.21,1583.74 1335.01,1583.74 U2.10
  Top Layer w32: P5.13@112,2028 R37.2
  Bottom Layer w32: P5.13@115.46,2028.54 R38.1@227,2028.54
PA1: P5.12 R39.2 R40.1 U2.11 | length 2732.8
  Top Layer w11.6: R39.2@223.54,1921.03 R39.2 223.54,1881.46 243.55,1861.45 482.94,1861.45 490,1854.39 490,1766 508,1748 508,1670.89 524.6,1654.29 524.6,1580.4 542.6,1562.4 542.6,1489.9 559,1473.5 559,1401 578,1382 578,1305 595.6,1287.4 595.6,1214 612,1197.6 612,1125.39 760.79,976.6 1273.6,976.6 1351,1054 1351,1468 1287.89,1531.11 1287.89,1551.82 1300.2,1564.13 1335.09,1564.13 U2.11
  Top Layer w32: P5.12@112,1921.03 R39.2@223.54,1921.03
  Bottom Layer w32: P5.12@115.46,1921.57 R40.1@227,1921.57
PA2: P5.11 R41.2 R42.1 U2.12 | length 2628.8
  Top Layer w11.6: R41.2 225.54,1768.25 232.33,1761.45 468.66,1761.45 490.4,1739.71 490.4,1663.6 507,1647 507,1573.11 525,1555.11 525,1482.55 541.4,1466.16 541.4,1393.6 560,1375 560,1298.11 578,1280.11 578,1203 594.4,1186.6 594.4,1113.6 749,959 1280.89,959 1368.6,1046.71 1368.6,1478.4 1358.85,1488.15 1358.85,1544.39 1358.76,1544.49 U2.12
  Top Layer w32: P5.11@114,1828 R41.2
  Bottom Layer w32: P5.11@113.46,1828.54 R42.1@225,1828.54
PA3: P5.10 R43.2 R44.1 U2.13 | length 2498.4
  Top Layer w11.6: R43.2 225.54,1673.8 232.33,1667 462.11,1667 488.31,1640.8 488.31,1566.91 506.6,1548.62 506.6,1472.4 523.8,1455.2 523.8,1378.2 542,1360 542,1291.22 560,1273.22 560,1192.89 576.8,1176.09 576.8,1104.09 739.49,941.4 1288.18,941.4 1386.31,1039.53 U2.13
  Top Layer w32: P5.10@114,1728 R43.2
  Bottom Layer w32: P5.10@113.46,1728.54 R44.1@225,1728.54
PA4: P5.9 R45.2 R46.1 U2.14 | length 2449.4
  Top Layer w11.6: R45.2 225.54,1576.46 241.55,1560.45 469.88,1560.45 489,1541.33 489,1465.11 505.6,1448.51 505.6,1371.51 524.4,1352.71 524.4,1280.49 542.4,1262.49 542.4,1185.6 559.2,1168.8 559.2,1096.8 732.2,923.8 1295.47,923.8 1405.99,1034.32 U2.14
  Top Layer w32: P5.9@114,1628 R45.2
  Bottom Layer w32: P5.9@113.46,1628.54 R46.1@225,1628.54
PA5: P5.8 R47.2 R48.1 U2.15 | length 2401.4
  Top Layer w11.6: R47.2 225.54,1473.54 237.62,1461.45 467.77,1461.45 488,1441.22 488,1364.22 506.8,1345.42 506.8,1273.2 524.8,1255.2 524.8,1178.31 541.6,1161.51 541.6,1089.51 724.91,906.2 1302.76,906.2 1425.68,1029.12 U2.15
  Top Layer w32: P5.8@114,1527 R47.2
  Bottom Layer w32: P5.8@113.46,1527.54 R48.1@225,1527.54
PA6: P5.7 R49.2 R50.1 U2.16 | length 2353.6
  Top Layer w11.6: R49.2 225.54,1372.8 232.33,1366 461.33,1366 489.2,1338.13 489.2,1264.8 507.2,1246.8 507.2,1171.02 524,1154.22 524,1082.22 717.62,888.6 1310.05,888.6 1445.36,1023.91 U2.16
  Top Layer w32: P5.7@114,1428 R49.2
  Bottom Layer w32: P5.7@113.46,1428.54 R50.1@225,1428.54
PA7: P5.6 R51.2 R52.1 U2.17 | length 2306.8
  Top Layer w11.6: R51.2 225,1327.46 225,1275 238.55,1261.45 467.66,1261.45 489.6,1239.51 489.6,1163.51 506.4,1146.71 506.4,1073.6 709,871 1317.34,871 1465.05,1018.71 U2.17
  Top Layer w32: P5.6@113.46,1327.46 R51.2@225,1327.46
  Bottom Layer w32: P5.6@114,1328 R52.1
PA8: P4.5 R25.2 R26.1 U2.29 | length 1060.9
  Top Layer w11.2: U2.29 1654.14,1623.11 1736.59,1623.11 1825.8,1533.9 1825.8,1315.2 1915.75,1225.25 2121.25,1225.25 2147.46,1251.46 R25.2
  Top Layer w32: R25.2@2151,1292.54 P4.5@2262.54,1292.54
  Bottom Layer w32: R26.1@2148.93,1292.54 P4.5@2260.46,1292.54
PA9: P4.6 R23.2 R24.1 U2.30 | length 982.7
  Top Layer w11.2: U2.30 1741.11,1642.91 1843,1541.03 1843,1403 1920.75,1325.25 2125.25,1325.25 2147.46,1347.46 R23.2
  Top Layer w32: R23.2 P4.6@2259,1392
  Bottom Layer w32: R24.1@2152.46,1392 P4.6
PA10: P4.7 R21.2 R22.1 U2.31 | length 943.9
  Top Layer w11.2: U2.31 1745.75,1662.6 1860.2,1548.15 1860.2,1431.81 1866.76,1425.25 2140.9,1425.25 2147.46,1431.81 R21.2
  Top Layer w32: R21.2@2148,1492.54 P4.7@2259.54,1492.54
  Bottom Layer w32: R22.1@2151.93,1492.54 P4.7@2263.46,1492.54
PA11: P4.8 R19.2 R20.1 U2.32 | length 850.9
  Top Layer w11.2: U2.32 1750.39,1682.28 1909.42,1523.25 2143.44,1523.25 2150,1529.81 2150,1589.46 R19.2
  Top Layer w32: R19.2@2148,1591.54 P4.8@2259.54,1591.54
  Bottom Layer w32: R20.1@2151.93,1591.54 P4.8@2263.46,1591.54
PA12: P4.9 R17.2 R18.1 U2.33 | length 811.2
  Top Layer w11.2: U2.33 1755.03,1701.97 1831.75,1625.25 2140.9,1625.25 2147.46,1631.81 R17.2
  Top Layer w32: R17.2@2148,1692.54 P4.9@2259.54,1692.54
  Bottom Layer w32: R18.1@2151.93,1692.54 P4.9@2263.46,1692.54
PA15: P4.10 R15.2 R16.1 U2.38 | length 1068.4
  Top Layer w11.2: U2.38 1583.16,1900.24 1589.72,1906.8 1825.2,1906.8 1876,1856 1876,1736.96 1882.56,1730.4 2123.4,1730.4 2147.46,1754.46 R15.2
  Top Layer w32: R15.2@2148,1792.54 P4.10@2259.54,1792.54
  Bottom Layer w32: R16.1@2151.93,1792.54 P4.10@2263.46,1792.54
PB0: P5.5 R53.2 R54.1 U2.18 | length 2249.6
  Top Layer w11.6: R53.2 228.54,1184.46 251.55,1161.45 466.77,1161.45 488.8,1139.42 488.8,1065.09 700.49,853.4 1324.63,853.4 1484.73,1013.5 U2.18
  Top Layer w32: P5.5 R53.2
  Bottom Layer w32: P5.5@110.46,1228.54 R54.1@222,1228.54
PB1: P5.4 R55.2 R56.1 U2.19 | length 2199.6
  Top Layer w11.6: R55.2 228.54,1088.46 254,1063 466,1063 693.2,835.8 1331.92,835.8 1504.42,1008.3 U2.19
  Top Layer w32: P5.4 R55.2
  Bottom Layer w32: P5.4@110.46,1128.54 R56.1@222,1128.54
PB2: P5.3 R57.2 R58.1 U2.20 | length 2202.5
  Top Layer w11.6: R57.2 228.54,976.46 243.55,961.45 542.66,961.45 685.91,818.2 1339.21,818.2 1524.1,1003.09 U2.20
  Top Layer w32: P5.3 R57.2
  Bottom Layer w32: P5.3@110.46,1028.54 R58.1@222,1028.54
PB3: P4.11 R13.2 R14.1 U2.39 | length 1005.5
  Top Layer w11.2: U2.39 1563.47,1910.47 1577,1924 1833,1924 1931,1826 2127,1826 2147.46,1846.46 R13.2
  Top Layer w32: R13.2@2148,1892.54 P4.11@2259.54,1892.54
  Bottom Layer w32: R14.1@2151.93,1892.54 P4.11@2263.46,1892.54
PB4: P4.12 R11.2 R12.1 U2.40 | length 997.4
  Top Layer w11.2: U2.40 1543.79,1915.79 1569.2,1941.2 1858.8,1941.2 1873,1927 2123,1927 2147.46,1951.46 R11.2
  Top Layer w32: R11.2@2146,1985.57 P4.12@2257.54,1985.57
  Bottom Layer w32: R12.1@2153.93,1985.57 P4.12@2265.46,1985.57
PB5: P4.13 R9.2 R10.1 U2.41 | length 1051.6
  Top Layer w11.2: U2.41 1524.1,1922.1 1560.4,1958.4 1808.4,1958.4 1878,2028 2126,2028 2147.46,2049.46 R9.2
  Top Layer w32: R9.2@2146,2092.54 P4.13@2257.54,2092.54
  Bottom Layer w32: R10.1@2153.93,2092.54 P4.13@2265.46,2092.54
PB6: P4.14 R7.2 R8.1 U2.42 | length 1143.4
  Top Layer w11.2: U2.42 1504.42,1879.58 1505.76,1880.93 1505.76,1928.09 1553.28,1975.6 1791.25,1975.6 1877.89,2062.24 1877.89,2102.89 1900.26,2125.25 2130.25,2125.25 2147.46,2142.46 R7.2
  Top Layer w32: R7.2@2146,2192.54 P4.14@2257.54,2192.54
  Bottom Layer w32: R8.1@2153.93,2192.54 P4.14@2265.46,2192.54
PB7: P4.15 R5.2 R6.1 U2.43 | length 1276.6
  Top Layer w11.2: U2.43 1484.73,1884.22 1488.56,1888.05 1488.56,1937.56 1543.8,1992.8 1784.12,1992.8 1860.69,2069.37 1860.69,2220.44 1867.25,2227 2117,2227 2150.11,2260.11 2150.11,2289.36 R5.2
  Top Layer w32.2: R5.2 P4.15
  Bottom Layer w32.2: R6.1 P4.15
PB8: P4.16 R3.2 R4.1 U2.45 | length 1385.9
  Top Layer w11.2: U2.45 1445.36,1918.69 1536.68,2010 1777,2010 1843.49,2076.49 1843.49,2270.49 1899.4,2326.4 2140.9,2326.4 2147.46,2332.96 R3.2
  Top Layer w32.2: R3.2 P4.16
  Bottom Layer w32.2: R4.1 P4.16
PB9: P5.14 R35.2 R36.1 U2.46 | length 1635.4
  Top Layer w11.2: R35.2 223.54,2071.54 233.82,2061.25 480.75,2061.25 619,1923 1394,1923 1425.68,1891.32 U2.46
  Top Layer w32: P5.14@112,2128 R35.2
  Bottom Layer w32: P5.14@115.46,2128.54 R36.1@227,2128.54
PB10: P5.2 R59.2 R60.1 U2.21 | length 2191.4
  Top Layer w11.6: R59.2 228.54,888.46 255.55,861.45 617.77,861.45 678.62,800.6 1346.5,800.6 1543.79,997.89 U2.21
  Top Layer w32: P5.2 R59.2
  Bottom Layer w32: P5.2@110.46,928.54 R60.1@222,928.54
PB11: P5.1 R61.2 R62.1 U2.22 | length 2214.5
  Top Layer w11.6: R61.2 228.54,784.46 260,753 460,753 490,783 1353.79,783 1563.47,992.68 U2.22
  Top Layer w32: P5.1 R61.2
  Bottom Layer w32: P5.1@110.46,828.54 R62.1@222,828.54
PB12: P4.1 R33.2 R34.1 U2.25 | length 1366.6
  Top Layer w11.2: U2.25 1717.92,1544.49 1757,1505.4 1757,993 1932,818 2115,818 2147.46,850.46 R33.2
  Top Layer w32: R33.2@2151,892.54 P4.1@2262.54,892.54
  Bottom Layer w32: R34.1@2148.93,892.54 P4.1@2260.46,892.54
PB13: P4.2 R31.2 R32.1 U2.26 | length 1305.3
  Top Layer w11.2: U2.26 1654.14,1564.06 1722.67,1564.06 1774.2,1512.53 1774.2,1081.09 1936.04,919.25 2140.9,919.25 2147.46,925.81 R31.2
  Top Layer w32: R31.2@2151,992.54 P4.2@2262.54,992.54
  Bottom Layer w32: R32.1@2148.93,992.54 P4.2@2260.46,992.54
PB14: P4.3 R29.2 R30.1 U2.27 | length 1215.5
  Top Layer w11.2: U2.27 1727.19,1583.86 1791.4,1519.65 1791.4,1163.61 1929.75,1025.25 2134.25,1025.25 2147.46,1038.46 R29.2
  Top Layer w32: R29.2@2151,1092.54 P4.3@2262.54,1092.54
  Bottom Layer w32: R30.1@2148.93,1092.54 P4.3@2260.46,1092.54
PB15: P4.4 R27.2 R28.1 U2.28 | length 1157
  Top Layer w11.2: U2.28 1731.83,1603.54 1808.6,1526.78 1808.6,1243.4 1926.75,1125.25 2150.44,1125.25 2157,1131.81 2157,1182.46 R27.2
  Top Layer w32: R27.2@2151,1192.54 P4.4@2262.54,1192.54
  Bottom Layer w32: R28.1@2148.93,1192.54 P4.4@2260.46,1192.54
SWCLK: P3.3 U2.37 | length 361
  Top Layer w11.2: v1(1478,2005) 1510.4,2037.4 1510.4,2080.4 P3.3 ; U2.37 1602.84,1841.73 1621.32,1860.21 1621.32,1868.32 v1(1623,1870)
  Bottom Layer w11.2: v1(1478,2005) 1611.32,1871.68 1621.32,1871.68 v1(1623,1870)
SWDIO: P3.2 U2.34 | length 796.6
  Top Layer w11.2: P3.2 1564,2117 1586,2139 1656,2139 1678,2117 v1(1678,2041) ; U2.34 1780.35,1721.65 1796,1737.31 1796,1842 1783.46,1854.54 1692.08,1854.54 1677,1869.62 v1(1677,1872)
  Bottom Layer w11.2: v1(1677,1872) 1677.5,1872.5 1677.5,2040.5 v1(1678,2041)
pads on no net: U2.1 U2.2

## Polygon pours and split planes (outlines as drawn)
GND on Bottom Layer "GND_L04_P001" (solid, remove dead copper, pour order 1): -5,713 -5,2525 2365,2525 2365,713
GND on Top Layer "GND_L01_P000" (solid, remove dead copper, pour order 0): -5,713 -5,2525 2365,2525 2365,713
GND on GND_layer (split plane): 2344.9,733.1 15.1,733.1 15.1,2504.9 2344.9,2504.9
+3.3V on 3.3V_layer (split plane): 2344.9,733.1 15.1,733.1 15.1,2504.9 2344.9,2504.9

## Keep-outs
Keep-Out Layer:
  the board outline again, w32

## Silkscreen, mask and mechanical layers (free items; w line width, h text height)
Top Overlay:
  text "GND" at 190,2468.78 h60
  text "PB8" at 1923,2373.63 h60
  text "PB7" at 1923,2275.79 h60
  text "9V" at 190,2215.72 h60
  text "PB6" at 1923,2171.3 h60
  text "3.3V" at 1293.22,2136 h60 r90
  text "BOOT0" at 1345.28,2136 h60 r90
  text "GND" at 1397.22,2136 h60 r90
  text "GND" at 1481.22,2136 h60 r90
  text "SWCLK" at 1533.51,2136 h60 r90
  text "SWDIO" at 1583.97,2136 h60 r90
  text "3.3V" at 1632.43,2136 h60 r90
  text "PB9" at 330,2113.72 h60
  text "PB5" at 1923,2074.3 h60
  text "PB0" at 330,2010.78 h60
  text "PB4" at 1923,1972.91 h60
  text "PA1" at 330,1909 h60
  text "PB3" at 1923,1876.57 h60
  text "PA2" at 330,1812 h60
  text "PA15" at 1923,1771.3 h60
  text "PA3" at 330,1711.78 h60
  text "PA12" at 1923,1673.52 h60
  text "PA4" at 330,1608.11 h60
  text "PA11" at 1923,1572.79 h60
  text "PA5" at 330,1506.78 h60
  text "PA10" at 1923,1476.57 h60
  text "PA6" at 330,1412.78 h60
  text "PA9" at 1923,1371.25 h60
  text "PA7" at 330,1306 h60
  text "PA8" at 1923,1274.36 h60
  text "PB0" at 330,1210.78 h60
  text "PB15" at 1923,1173.57 h60
  text "PB1" at 330,1111 h60
  text "PB14" at 1922,1076.11 h60
  text "PB2" at 330,1010 h60
  text "PB13" at 1923,971.3 h60
  text "PB10" at 330,909.78 h60
  text "PB12" at 1923,873.52 h60
  text "PB11" at 332,810 h60